# Altium PCB FlashCraft.PcbDoc
Units mm, origin at the board's own origin, x right, y up, seen from the top; angles counter-clockwise.
Board outline 45 x 68.88 mm, 7 copper layers (Top Layer, Prepreg 2, Power, Core, GND_plane, Prepreg 1, Bottom Layer), stack 3.405 mm thick; 69 components, 45 nets, 237 pads, 67 vias.
Unrouted connection lines stored in the file: 5.
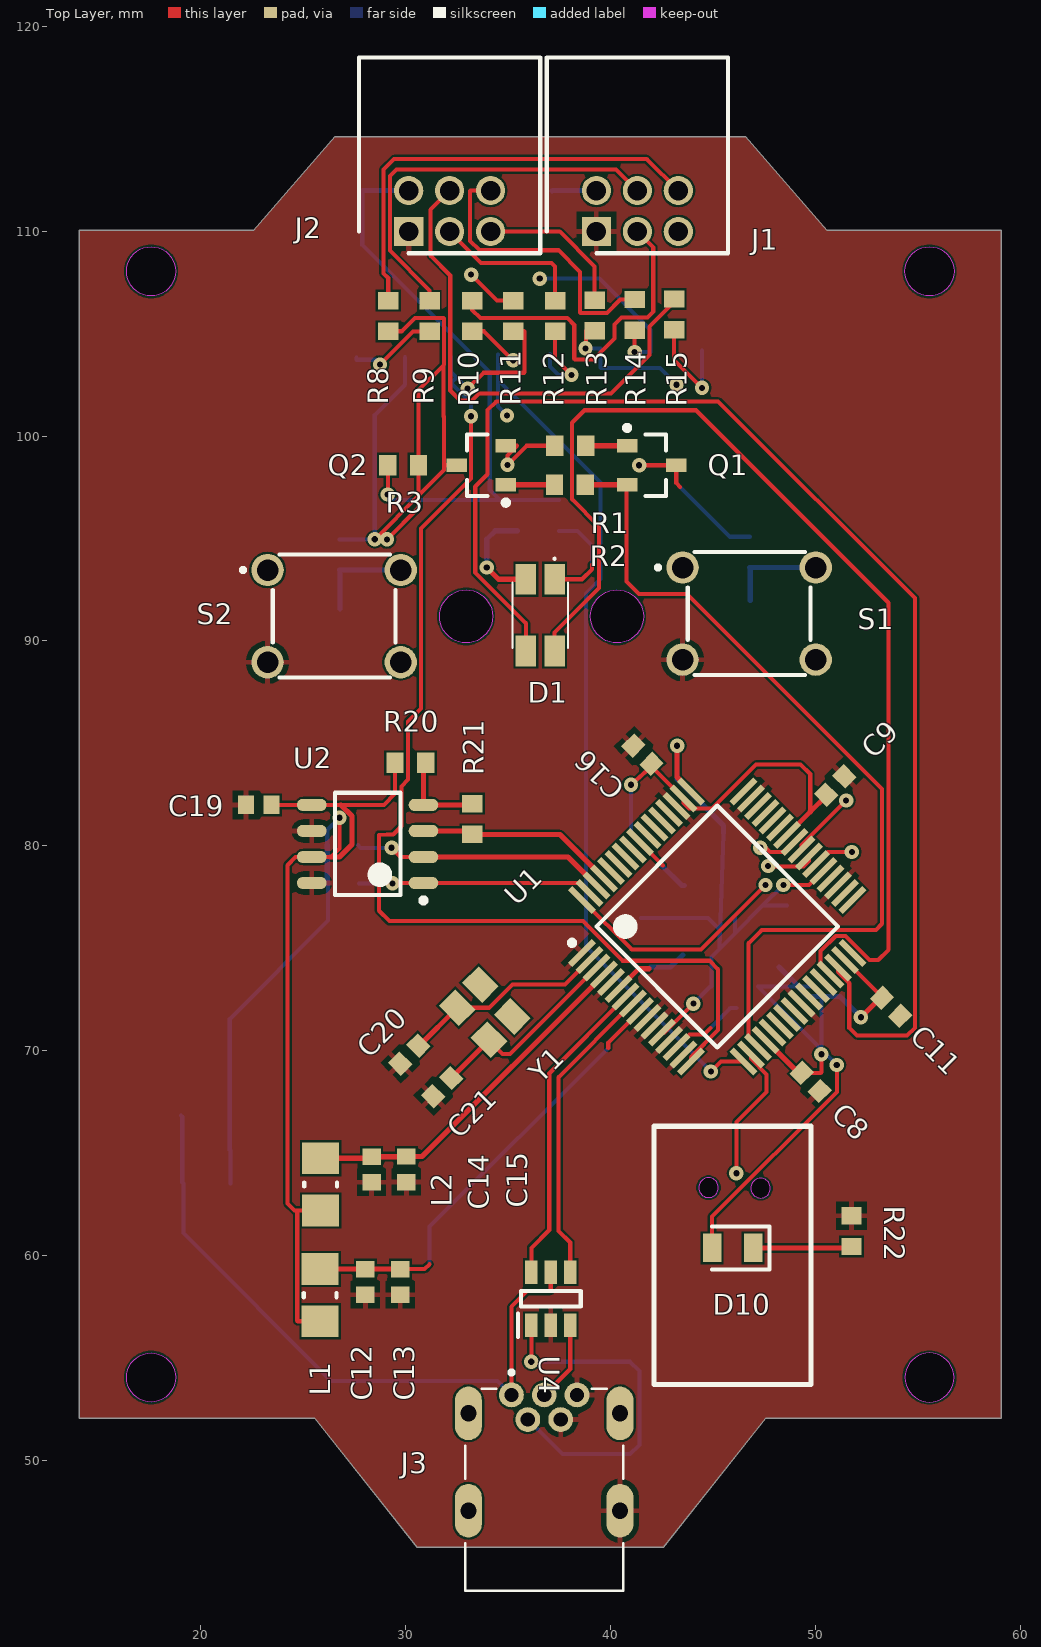
[diagram p0: Top Layer view]
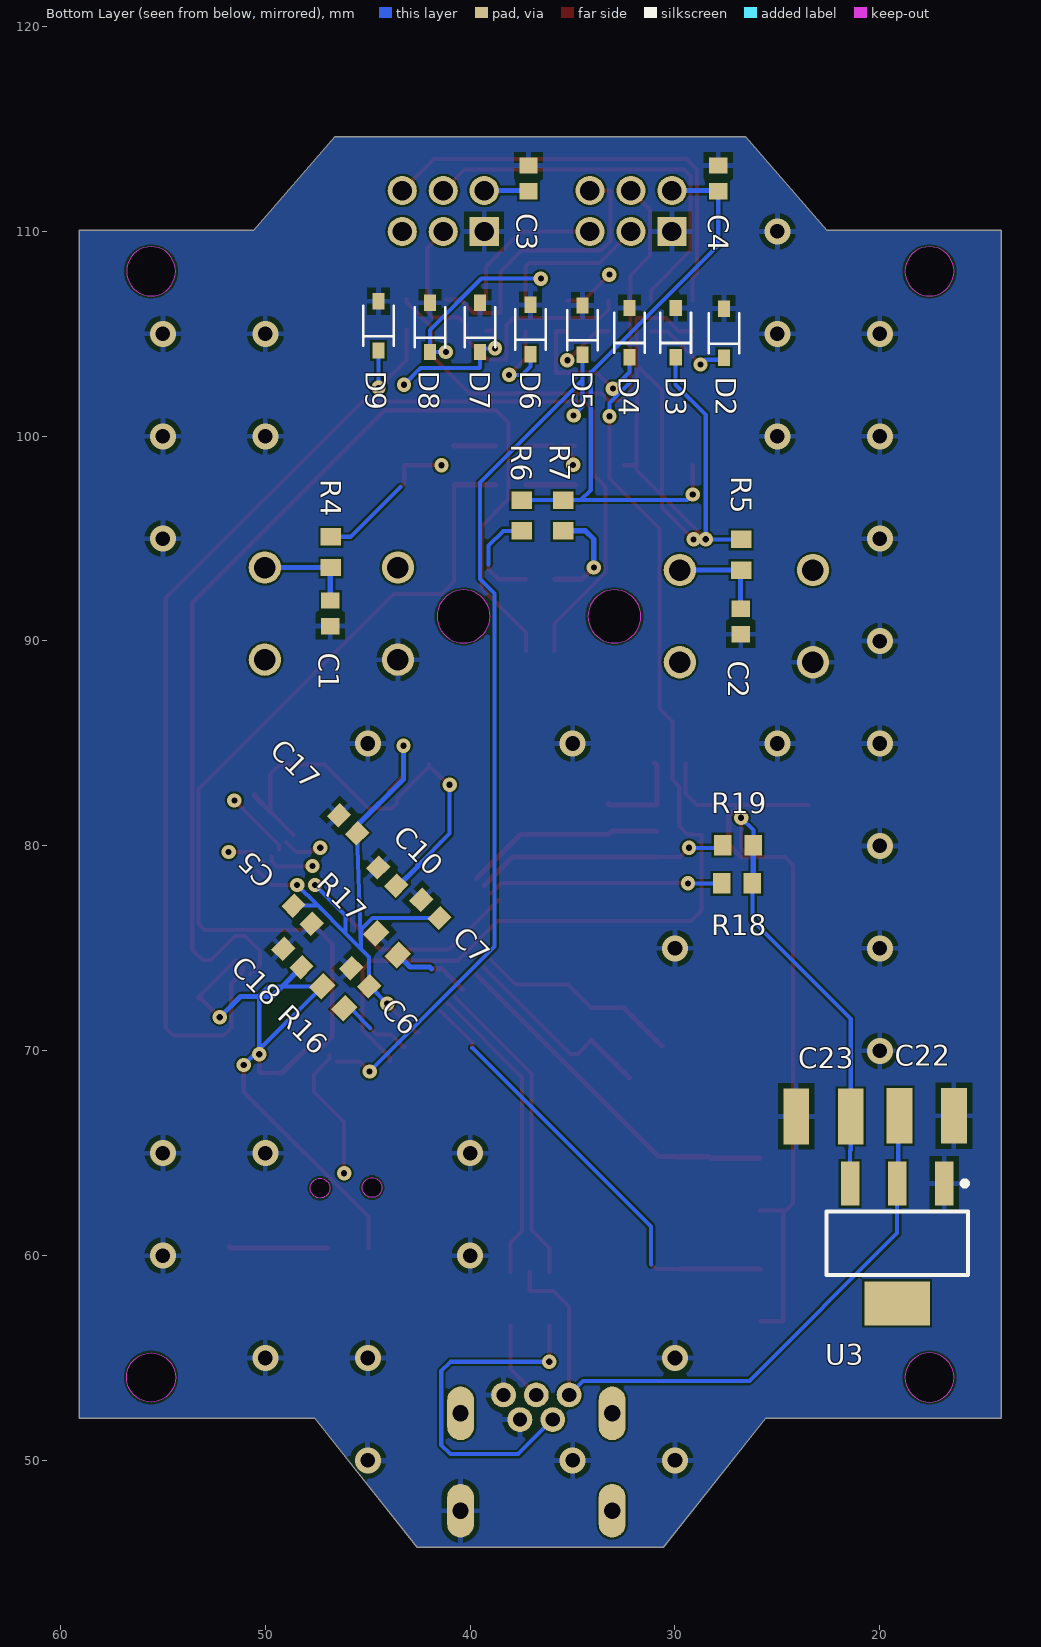
[diagram p1: Bottom Layer view, seen from below]
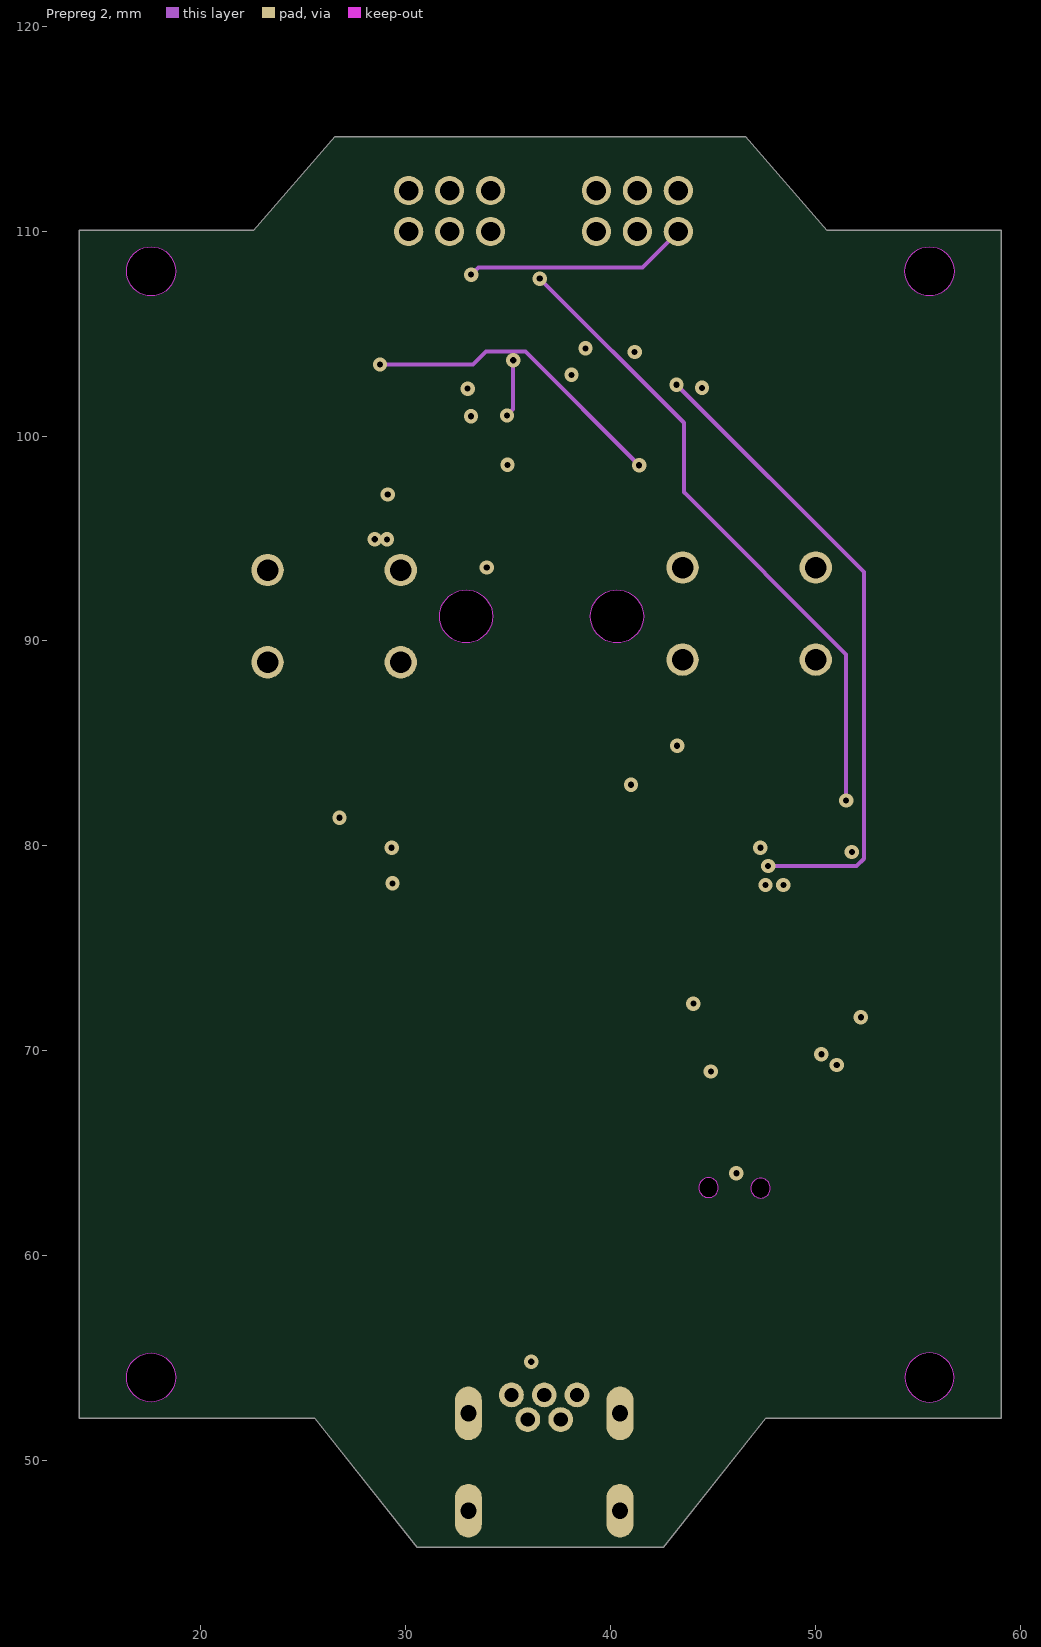
[diagram p2: Prepreg 2]
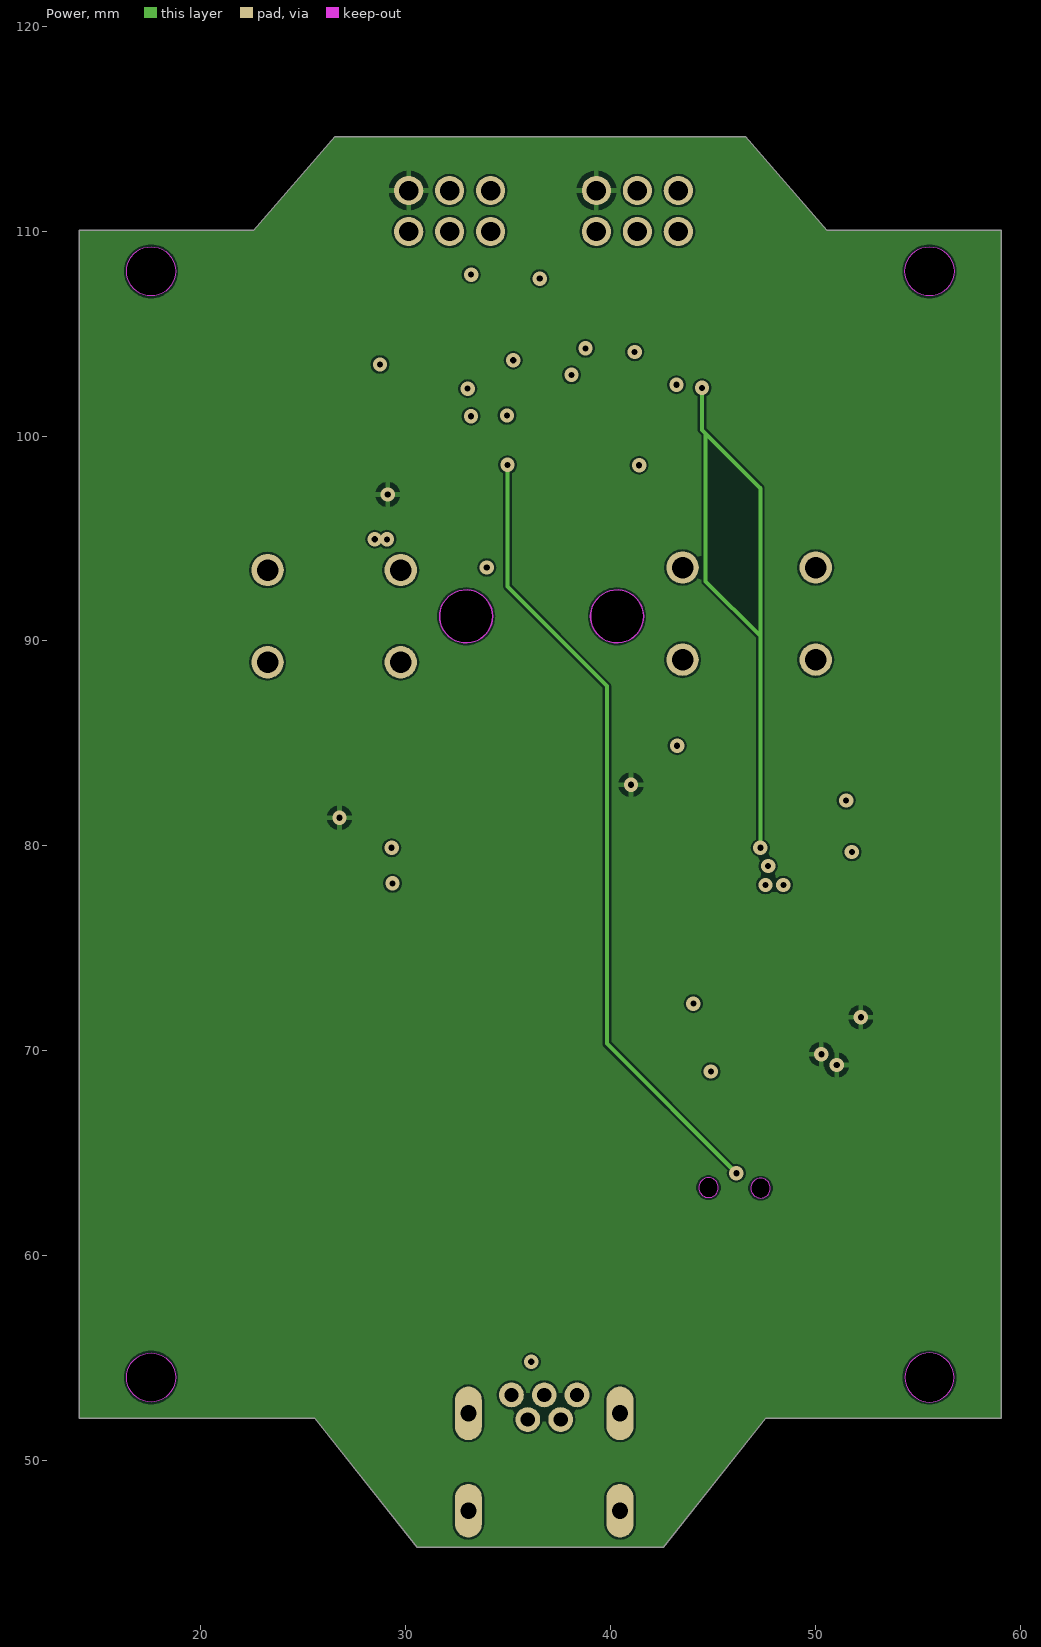
[diagram p3: Power]
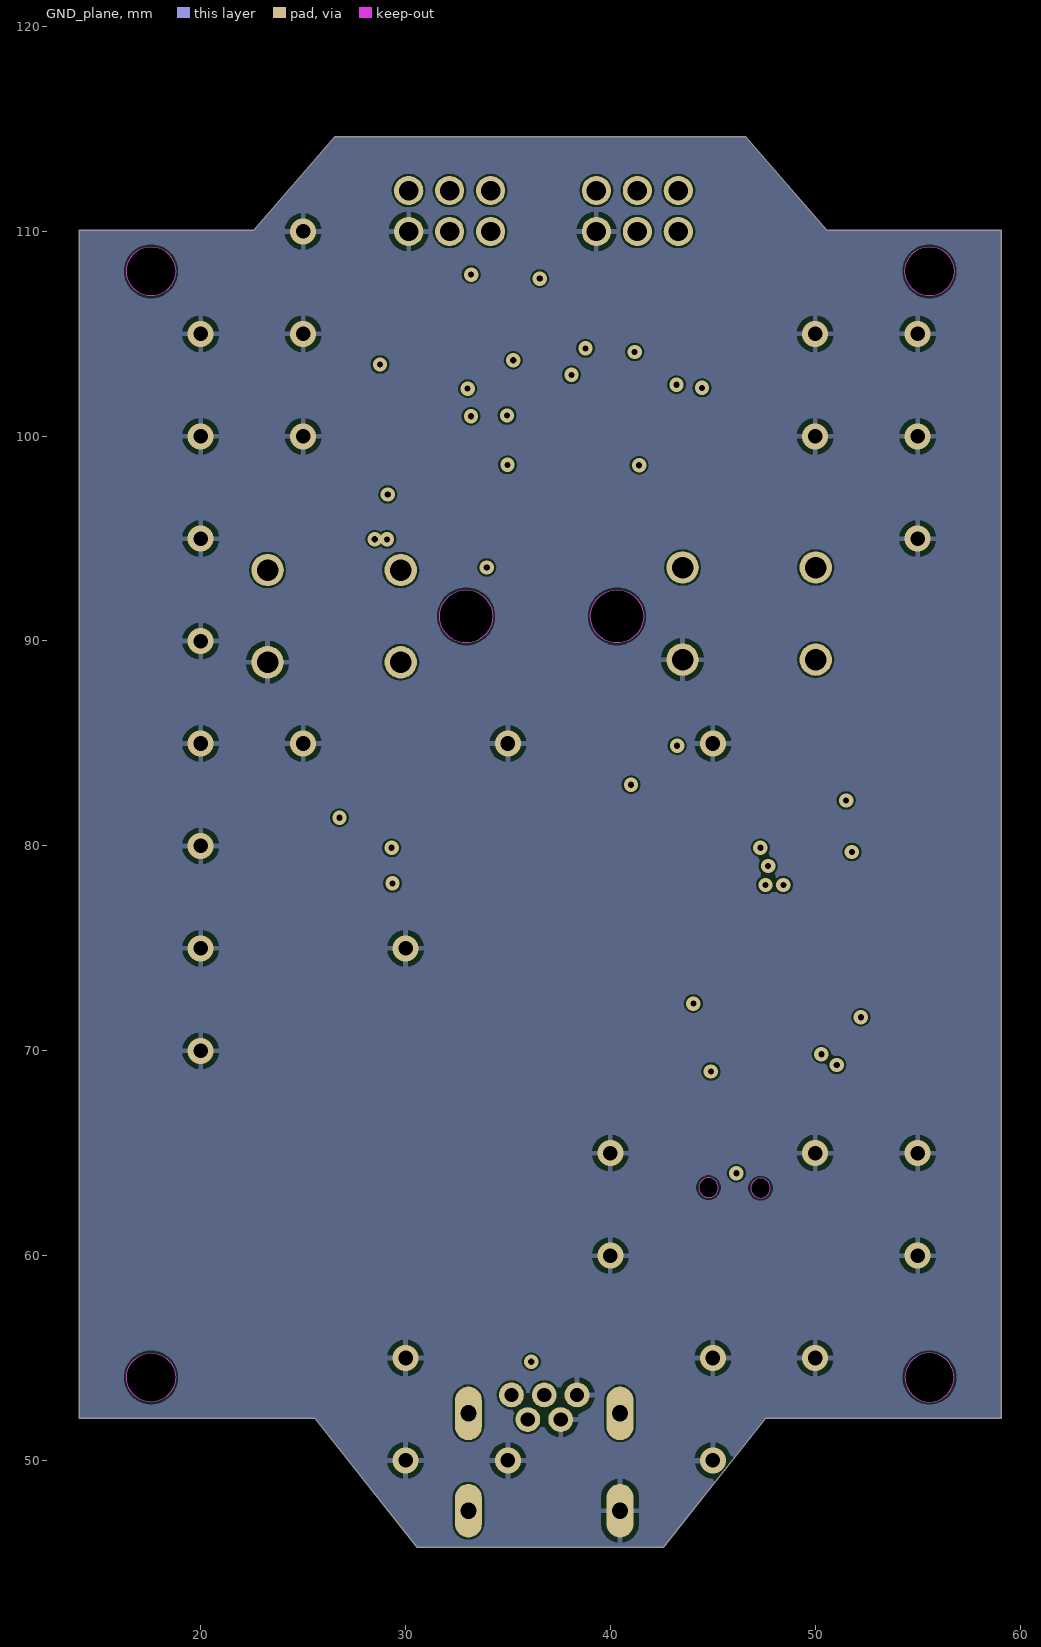
[diagram p4: GND_plane]
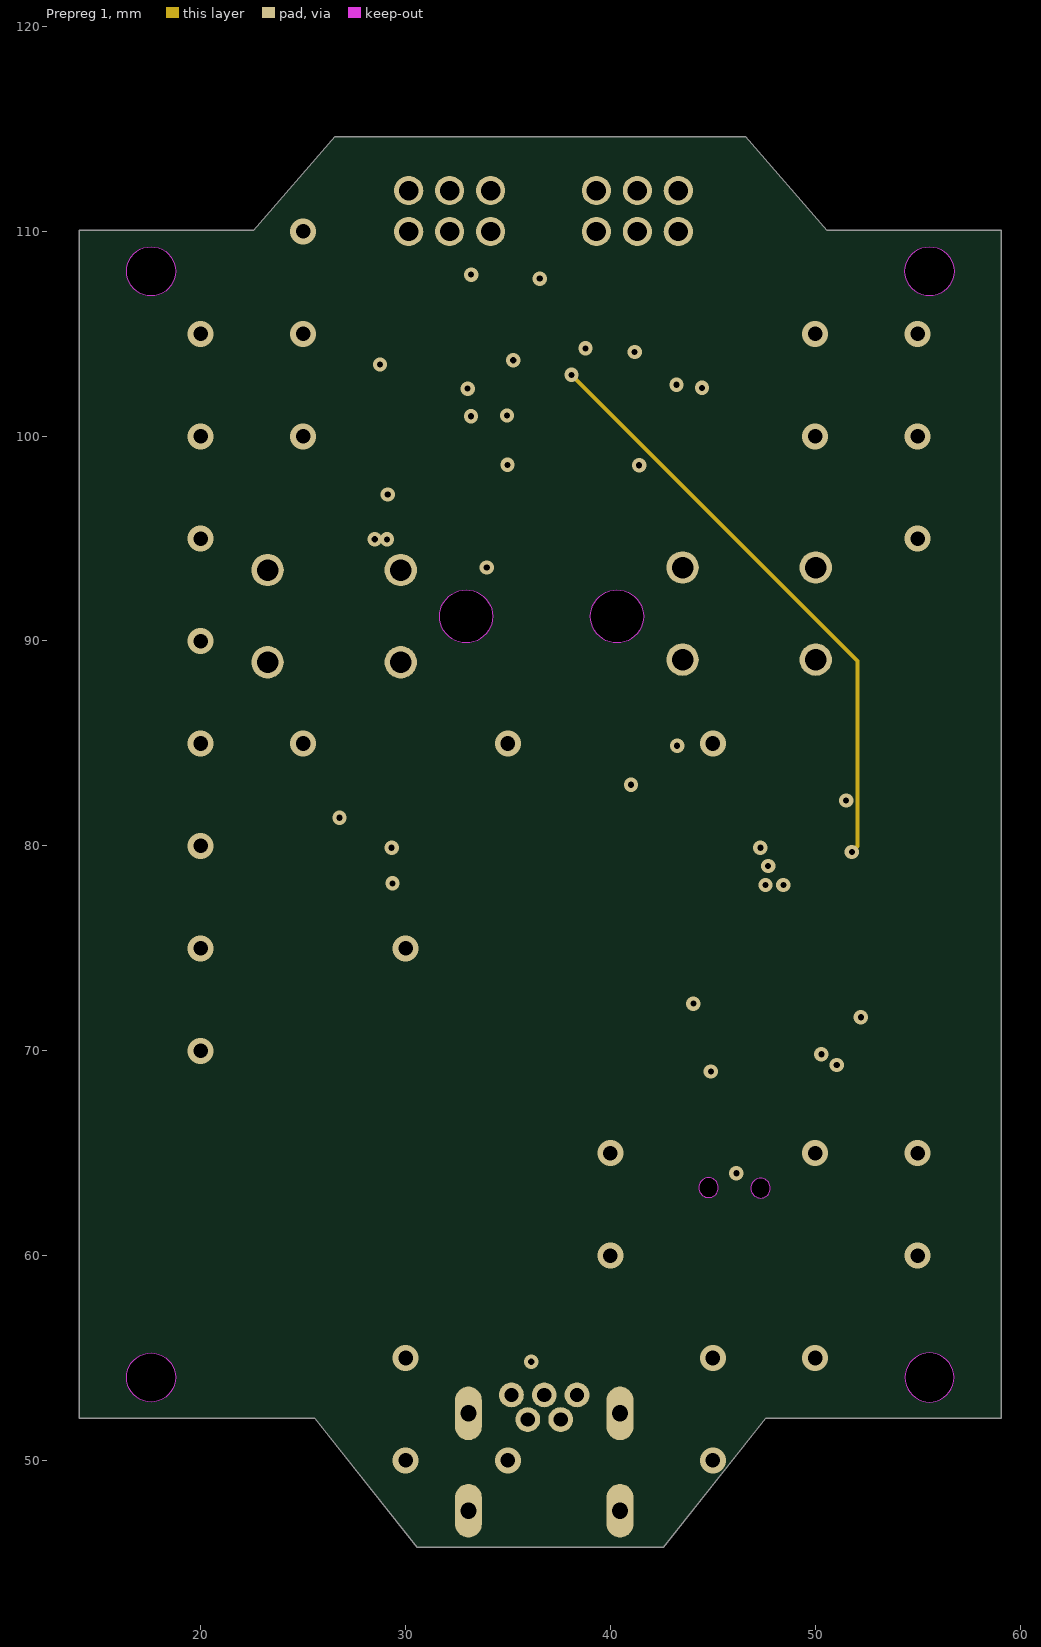
[diagram p5: Prepreg 1]
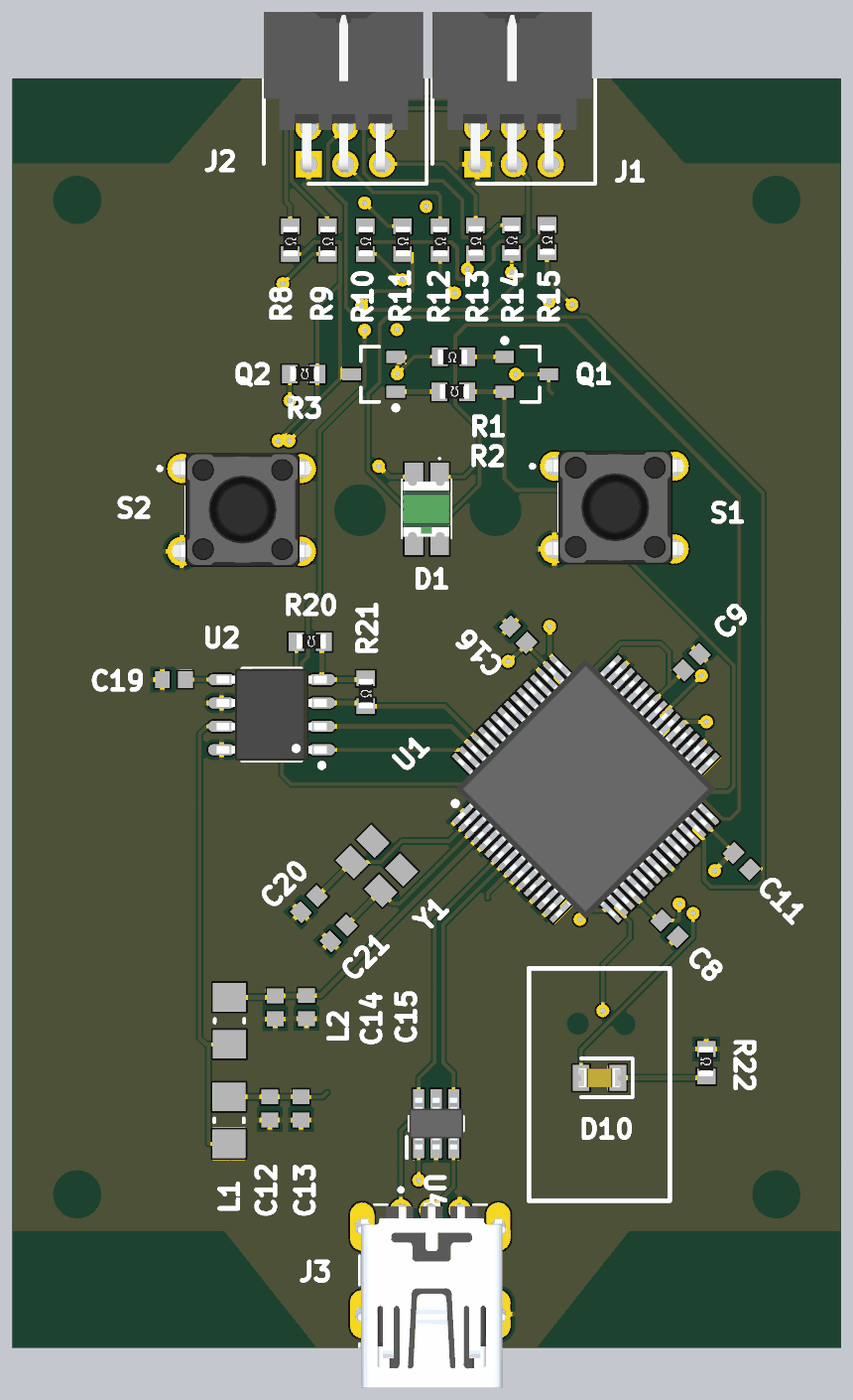
[diagram p6: 3D render of the assembled board from above, using the file's embedded part models]
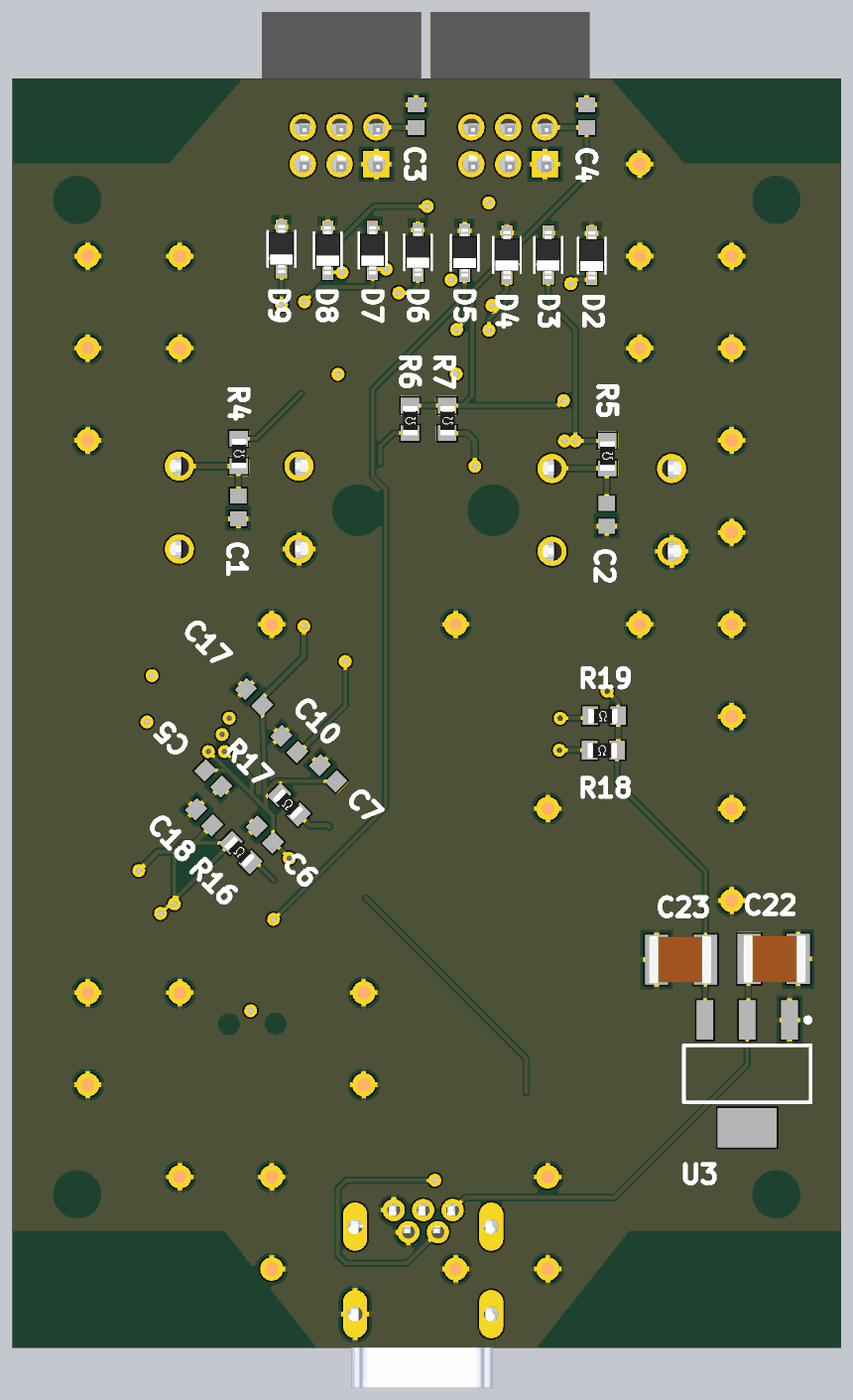
[diagram p7: 3D render of the assembled board from below, using the file's embedded part models]

## Layer stack, top to bottom
Top Solder: solder mask 0.0102, Solder Resist, Dk 3.5
Top Layer: signal copper 0.035
Dielectric 6: prepreg 0.0711, PP-006, Dk 4.1
Prepreg 2: signal copper 0.2
Dielectric 5: prepreg 0.0711, PP-006, Dk 4.1
Power: signal copper 0.035
Dielectric 1: dielectric 1.509, FR-4, Dk 4.8
Core: signal copper 1
Dielectric 4: prepreg 0.0711, PP-006, Dk 4.1
GND_plane: signal copper 0.035
Dielectric 3: prepreg 0.0711, PP-006, Dk 4.1
Prepreg 1: signal copper 0.2
Dielectric 2: prepreg 0.0711, PP-006, Dk 4.1
Bottom Layer: signal copper 0.035
Bottom Solder: solder mask 0.0102, Solder Resist, Dk 3.5

## Board outline
25.572,52.045 30.572,45.745 42.572,45.745 47.572,52.045 59.072,52.045 59.072,110.045 50.572,110.045 46.59,114.624 26.553,114.624 22.572,110.045 14.072,110.045 14.072,52.045
cut-out: 40.316,89.903 cw(c40.316,91.198) 39.021,91.198 cw(c40.316,91.198) 40.316,92.494 cw(c40.316,91.198) 41.612,91.198 cw(c40.316,91.198)
cut-out: 32.95,89.903 cw(c32.95,91.198) 31.655,91.198 cw(c32.95,91.198) 32.95,92.494 cw(c32.95,91.198) 34.246,91.198 cw(c32.95,91.198)
cut-out: 55.572,106.845 cw(c55.572,108.045) 54.372,108.045 cw(c55.572,108.045) 55.572,109.245 cw(c55.572,108.045) 56.772,108.045 cw(c55.572,108.045)
cut-out: 54.372,54.045 ccw(c55.572,54.045) 55.572,52.845 ccw(c55.572,54.045) 56.772,54.045 ccw(c55.572,54.045) 55.572,55.245 ccw(c55.572,54.045)
cut-out: 44.303,63.313 ccw(c44.785,63.313) 44.785,62.83 ccw(c44.785,63.313) 45.268,63.313 ccw(c44.785,63.313) 44.785,63.795 ccw(c44.785,63.313)
cut-out: 46.843,63.285 ccw(c47.325,63.285) 47.325,62.802 ccw(c47.325,63.285) 47.808,63.285 ccw(c47.325,63.285) 47.325,63.767 ccw(c47.325,63.285)
cut-out: 17.572,106.845 cw(c17.572,108.045) 16.372,108.045 cw(c17.572,108.045) 17.572,109.245 cw(c17.572,108.045) 18.772,108.045 cw(c17.572,108.045)
cut-out: 17.572,52.845 cw(c17.572,54.045) 16.372,54.045 cw(c17.572,54.045) 17.572,55.245 cw(c17.572,54.045) 18.772,54.045 cw(c17.572,54.045)

## Design rules (kind name [scope] priority, off if disabled: settings)
Clearance [All] p1: gap=0.1 ignorepadtopadclearanceinfootprint=FALSE
DiffPairsRouting [All] p1: maxlimit=0.254 minlimit=0.254 mostfreqgap=0.254 toplayer_minwidth=0.1 toplayer_maxwidth=0.381 toplayer_prefwidth=0.381 midlayer1_minwidth=0.1 midlayer1_maxwidth=0.381 midlayer1_prefwidth=0.381 midlayer2_minwidth=0.1 midlayer2_maxwidth=0.381 midlayer2_prefwidth=0.381 midlayer3_minwidth=0.1 midlayer3_maxwidth=0.381 midlayer3_prefwidth=0.381 midlayer4_minwidth=0.1 midlayer4_maxwidth=0.381 midlayer4_prefwidth=0.381 midlayer5_minwidth=0.1 midlayer5_maxwidth=0.381 midlayer5_prefwidth=0.381 bottomlayer_minwidth=0.1 bottomlayer_maxwidth=0.381 bottomlayer_prefwidth=0.381 maxuncoupledlength=12.7
FanoutControl Fanout_Default [All] p1: bgadir=Out bgaviamode=Centered fanoutstyle=Auto fanoutdirection=Alternating viagrid=0.025 // Fanout_Default (Default Rule)
FanoutControl Fanout_Small [(CompPinCount < 5)] p2: bgadir=Out bgaviamode=Centered fanoutstyle=Auto fanoutdirection=OutThenIn viagrid=0.025 // Fanout_Small (Default Rule)
FanoutControl Fanout_LCC [IsLCC] p4: bgadir=Out bgaviamode=Centered fanoutstyle=Auto fanoutdirection=Alternating viagrid=0.025 // Fanout_LCC (Default Rule)
FanoutControl Fanout_BGA [IsBGA] p5: bgadir=Out bgaviamode=Centered fanoutstyle=Auto fanoutdirection=Alternating viagrid=0.025 // Fanout_BGA (Default Rule)
PlaneClearance [All] p1: clearance=0.254
PlaneConnect [All] p1: planeconnectstyle=Relief reliefexpansion=0.5 reliefentries=4 reliefconductorwidth=0.2 reliefairgap=0.3
PolygonConnect [All] p1: connectstyle=Relief reliefconductorwidth=0.254 reliefentries=4 polygonreliefangle="90 Angle" airgapwidth=0.254
PolygonConnect PolygonConnect_GND_VIA [isvia and InNet('GND')] p2: connectstyle=Relief reliefconductorwidth=0.254 reliefentries=4 polygonreliefangle="90 Angle" airgapwidth=0.254
RoutingVias [All] p1: holewidth=0.3 width=0.7 viastyle="Through Hole" minholewidth=0.3 minwidth=0.7 maxholewidth=0.3 maxwidth=0.7
SolderMaskExpansion [All] p1: expansion=0.102 istentingtop=FALSE
SupplyNets "Schematic Supply Nets" [InNet('1V8')] p1: voltage=0.000
SupplyNets "Schematic Supply Nets_1" [InNet('GND')] p2: voltage=0.000
SupplyNets "Schematic Supply Nets_2" [InNet('5V')] p3: voltage=0.000
SupplyNets "Schematic Supply Nets_3" [InNet('3V3')] p4: voltage=0.000
Width [All] p1: maxlimit=1 minlimit=0.2 preferedwidth=0.2
23 further rules are at their usual default settings.

## Classes and differential pairs
differential pair usb: +usb_P -usb_N

## Components (designator, comment, footprint, x,y, rotation, side; value= is the part's Value field where it differs from the comment)
C1 "Capacitor" CAP-0603 46.82,91.352 r90 bottom
C2 "Capacitor" CAP-0603 26.79,90.946 r90 bottom
C3 "Capacitor" CAP-0603 37.147,112.589 r270 bottom
C4 "Capacitor" CAP-0603 27.882,112.589 r270 bottom
C5 "Capacitor" CAP-0603 48.176,76.635 r45 bottom
C6 "Capacitor" CAP-0603 45.368,73.584 r225 bottom
C7 "Capacitor" CAP-0603 41.933,76.917 r225 bottom
C8 "Capacitor" CAP-0603 49.769,68.471 r135 top
C9 "Capacitor" CAP-0603 50.971,82.943 r225 top
C10 "Capacitor" CAP-0603 44.044,78.498 r225 bottom
C11 "Capacitor" CAP-0603 53.696,72.138 r135 top
C12 "Capacitor" CAP-0603 28.034,58.708 r90 top
C13 "Capacitor" CAP-0603 29.736,58.708 r90 top
C14 "Capacitor" CAP-0603 28.334,64.197 r90 top
C15 "Capacitor" CAP-0603 30.035,64.208 r90 top
C16 "Capacitor" CAP-0603 41.558,84.443 r315 top
C17 "Capacitor" CAP-0603 45.956,81.045 r225 bottom
C18 "Capacitor" CAP-0603 48.671,74.522 r225 bottom
C19 "Capacitor" CAP-0603 22.827,81.995 r0 top
C20 "Capacitor" CAP-0603 30.175,69.804 r45 top
C21 "Capacitor" CAP-0603 31.779,68.219 r45 top
C22 "Capacitor" CAP-1210 17.709,66.825 r0 bottom
C23 "Capacitor" CAP-1210 22.743,66.788 r180 bottom
D1 "LTST-C155KGJRKT" LTSTC155KGJRKT 36.571,91.262 r270 top
D2 "ESD7351HT1G" SOD-323-2 27.602,105.026 r90 bottom
D3 "ESD7351HT1G" SOD-323-2 29.964,105.052 r90 bottom
D4 "ESD7351HT1G" SOD-323-2 32.214,105.052 r90 bottom
D5 "ESD7351HT1G" SOD-323-2 34.511,105.179 r90 bottom
D6 "ESD7351HT1G" SOD-323-2 37.051,105.204 r90 bottom
D7 "ESD7351HT1G" SOD-323-2 39.515,105.306 r90 bottom
D8 "ESD7351HT1G" SOD-323-2 41.953,105.306 r90 bottom
D9 "ESD7351HT1G" SOD-323-2 44.468,105.382 r90 bottom
D10 "SML-H12U8TT86C" LEDC2012X90N 45.963,60.369 r180 top
J1 "Header 3X2" SHDR6W75P200_2X3_865X640X650P 39.31,109.989 r0 top locked
J2 "Header 3X2" SHDR6W75P200_2X3_865X640X650P 30.146,109.989 r0 top locked
J3 "USB_minB" XM7D-0512 36.765,52.289 r180 top locked
L1 "MPZ1608S102A" RESC3216X18N 25.825,58.062 r270 top
L2 "MPZ1608S102A" RESC3216X18N 25.85,63.469 r270 top
Q1 "BJT" SOT95P245X112-3N 42.011,98.577 r0 top
Q2 "BJT" SOT95P245X112-3N 33.688,98.577 r180 top
R1 "Resistor" R0603 38.036,99.527 r0 top
R2 "Resistor" R0603 38.016,97.627 r180 top
R3 "Resistor" R0603 29.878,98.577 r180 top
R4 "Resistor" R0603 46.796,94.336 r90 bottom
R5 "Resistor" R0603 26.766,94.211 r90 bottom
R6 "Resistor" R0603 37.478,96.126 r90 bottom
R7 "Resistor" R0603 35.459,96.126 r90 bottom
R8 "Resistor" R0603 29.149,105.867 r90 top
R9 "Resistor" R0603 31.171,105.867 r90 top
R10 "Resistor" R0603 33.241,105.867 r90 top
R11 "Resistor" R0603 35.261,105.867 r90 top
R12 "Resistor" R0603 37.293,105.867 r90 top
R13 "Resistor" R0603 39.223,105.893 r90 top
R14 "Resistor" R0603 41.179,105.918 r90 top
R15 "Resistor" R0603 43.109,105.943 r90 top
R16 "Resistor" R0603 46.68,72.606 r225 bottom
R17 "Resistor" R0603 44.053,75.197 r225 bottom
R18 "Resistor" R0603 26.964,78.165 r180 bottom
R19 "Resistor" R0603 26.921,80.034 r180 bottom
R20 "Resistor" R0603 30.23,84.047 r180 top
R21 "Resistor" R0603 33.251,81.307 r90 top
R22 "Resistor" R0603 51.765,61.189 r270 top
S1 "SW-PB" SKHHDHA010 43.519,93.586 r0 top locked
S2 "SW-PB" SKHHDHA010 23.259,93.461 r0 top locked
U1 "FT2232HL-REEL" TSQFP50P1200X1200X160-64N 45.211,76.059 r45 top
U2 "93C46" SOIC127P600X175-8N 28.141,80.09 r180 top
U3 "Voltage Regulator" REG-SOT230P700X180-4N 19.149,60.591 r270 bottom
U4 "USBLC6-2SC6" SOT95P280X145 37.084,57.887 r90 top
Y1 "XTAL4" WE-4XTAL3.2x2.5mm 33.857,71.879 r315 top

## Footprints (in the part's own frame and the unit in brackets; to place one, negate y for a bottom-side part, rotate by r counter-clockwise, add the part's x,y. Pads: shape width x height; smd on the part's side, far side on the other; paste and mask are expansions set on the pad)
CAP-0603 [mm]
  rect 0.8x0.9 smd: 1(-0.625,0) 2(0.625,0)
  body extent -0.87,-0.48 0.87,0.48, height 0.9
CAP-1210 [mm]
  rect 1.26x2.72 smd: 1(-1.33,0) 2(1.33,0)
  body extent -1.75,-1.3 1.65,1.3, height 1.5
LEDC2012X90N [mm]
  rect 0.9x1.4 smd: 1(-1,0) 2(1,0)
  silkscreen extent -1.8,-1.05 1,1.05, body extent -1.15,-0.51 1.15,0.51, height 0.82
LTSTC155KGJRKT [mm]
  rect 1.5x1 smd: 1(-1.75,0.7) 2(-1.75,-0.7) 3(1.75,0.7) 4(1.75,-0.7)
  silkscreen extent -2.8,-1.35 1.6,1.35, body extent -1.5,-1.27 1.5,1.23, height 1.1
R0603 [mm]
  rect 0.85x1 smd: 1(-0.75,0) 2(0.75,0)
  body extent -0.87,-0.42 0.73,0.38, height 0.47
REG-SOT230P700X180-4N [mm] "SOT223, 4-Leads, Body 6.60x7.00mm (avg), Pitch 2.30mm, IPC Medium Density"
  rect 2.15x0.9 smd: 1(-2.925,2.3) 2(-2.925,0) 3(-2.925,-2.3)
  rect 2.15x3.2 smd: 4(2.925,0)
  silkscreen extent -3.05,-3.45 1.55,3.45, body extent -1.85,-3.45 1.85,3.45, height 1.8
RESC3216X18N [mm] "Chip Resistor, 2-Leads, Body 3.20x1.60mm, IPC Medium Density"
  rect 1.55x1.8 smd: 1(-1.275,0) 2(1.275,0)
  silkscreen extent -0.1,-0.8 0.1,0.8, body extent -1.7,-0.9 1.7,0.9, height 1.8
SHDR6W75P200_2X3_865X640X650P [mm]
  rect 1.425x1.425 / inner round 1.425 / far side rect 1.425x1.425 hole 0.95: 1(0,0)
  round 1.425 hole 0.95: 2(0,2) 3(2,0) 4(2,2) 5(4,0) 6(4,2)
  silkscreen extent -2.42,-1.06 6.43,8.5, body extent -2.42,-0.39 6.24,8.26, height 6.45
SKHHDHA010 [mm]
  round 1.58 hole 1.05: 1(0,0) 2(6.5,0) 3(0,-4.5) 4(6.5,-4.5)
  silkscreen extent -1.3,-5.25 6.25,0.75, body extent -0.65,-5.33 7.25,0.87, height 17
SOD-323-2 [mm]
  rect 0.8x0.6 smd paste-0.025 mask+0.07: 1(1.2,0) 2(-1.2,0)
  silkscreen extent -0.97,-0.75 0.98,0.75, body extent -1.3,-0.67 1.3,0.68, height 1.1
SOIC127P600X175-8N [mm] "SOIC, 8-Leads, Body 4.90x3.90mm, Pitch 1.27mm, IPC Medium Density"
  oval 1.45x0.6 smd: 1(-2.725,1.905) 2(-2.725,0.635) 3(-2.725,-0.635) 4(-2.725,-1.905) 5(2.725,-1.905) 6(2.725,-0.635) 7(2.725,0.635) 8(2.725,1.905)
  silkscreen extent -2.85,-2.5 1.6,2.88, body extent -3,-2.5 3,2.5, height 1.75
SOT95P245X112-3N [mm] "SOT23, 3-Leads, Body 2.92x2.45mm, Pitch 0.95mm, IPC Medium Density"
  rect 1x0.65 smd: 1(-1.2,0.95) 2(-1.2,-0.95) 3(1.2,0)
  silkscreen extent -1.32,-1.5 0.7,1.95, body extent -0.7,-1.52 0.7,1.52, height 1.12
SOT95P280X145 [mm]
  rect 1.15x0.6 smd: 1(-1.3,0.95) 2(-1.3,0) 3(-1.3,-0.95) 4(1.3,-0.95) 5(1.3,0) 6(1.3,0.95)
  silkscreen extent -1.87,-1.46 0.38,1.6, body extent -1.4,-1.46 1.4,1.46, height 1.45
TSQFP50P1200X1200X160-64N [mm]
  rect 1.65x0.3 smd: 1(-5.575,3.75) 2(-5.575,3.25) 3(-5.575,2.75) 4(-5.575,2.25) 5(-5.575,1.75) 6(-5.575,1.25) 7(-5.575,0.75) 8(-5.575,0.25) 9(-5.575,-0.25) 10(-5.575,-0.75) 11(-5.575,-1.25) 12(-5.575,-1.75) 13(-5.575,-2.25) 14(-5.575,-2.75) 15(-5.575,-3.25) 16(-5.575,-3.75) 33(5.575,-3.75) 34(5.575,-3.25) 35(5.575,-2.75) 36(5.575,-2.25) 37(5.575,-1.75) 38(5.575,-1.25) 39(5.575,-0.75) 40(5.575,-0.25) 41(5.575,0.25) 42(5.575,0.75) 43(5.575,1.25) 44(5.575,1.75) 45(5.575,2.25) 46(5.575,2.75) 47(5.575,3.25) 48(5.575,3.75)
  rect 0.3x1.65 smd: 17(-3.75,-5.575) 18(-3.25,-5.575) 19(-2.75,-5.575) 20(-2.25,-5.575) 21(-1.75,-5.575) 22(-1.25,-5.575) 23(-0.75,-5.575) 24(-0.25,-5.575) 25(0.25,-5.575) 26(0.75,-5.575) 27(1.25,-5.575) 28(1.75,-5.575) 29(2.25,-5.575) 30(2.75,-5.575) 31(3.25,-5.575) 32(3.75,-5.575) 49(3.75,5.575) 50(3.25,5.575) 51(2.75,5.575) 52(2.25,5.575) 53(1.75,5.575) 54(1.25,5.575) 55(0.75,5.575) 56(0.25,5.575) 57(-0.25,5.575) 58(-0.75,5.575) 59(-1.25,5.575) 60(-1.75,5.575) 61(-2.25,5.575) 62(-2.75,5.575) 63(-3.25,5.575) 64(-3.75,5.575)
  silkscreen extent -5.7,-4.17 4.17,4.57, body extent -6,-6 6,6, height 1.6
WE-4XTAL3.2x2.5mm [mil]
  rect 55.12x45.28 smd: 1(-43.31,-31.5) 2(43.31,-31.5) 3(43.31,31.5) 4(-43.31,31.5)
XM7D-0512 [mm] "USB B mini"
  round 1.208 hole 0.7: 1(1.6,-0.9) 2(0.8,0.3) 3(0,-0.9) 4(-0.8,0.3) 5(-1.6,-0.9)
  oval 1.308x2.616 hole 0.8: SH1(-3.7,4.75) SH2(-3.7,0) SH3(3.7,0) SH4(3.7,4.75)
  silkscreen extent -3.85,-2.1 3.85,8.65, body extent -4.13,-1.1 3.98,8.75, height 4.05

## Part data
C1 C2 C3 C4 C5 C6 C7 C8 C9 C10 C11 C12 C15 C18 C19: library part C-000000011, Value 1=1uF, Value 2="50 VDC", DES="Multilayer Ceramic Capacitors MLCC - SMD/SMT Automotive Grade,MLCC,0603,X7R,50V,1uF,+/-10%,0.8mm", FTP=0603, MAN=TDK, MANREF=CGA3E3X7R1H105K080AB, NOTE=_, Part Number=C-000000011, SUP=Mouser, SUPREF=810-CGA3E3X7R1H105K0, TOL=10%
C13 C14 C16 C17: library part C-000000007, Value 1="4.7 uF", Value 2="25 VDC", DES=GRT188C81E475KE13D, FTP=0603, MAN="Multilayer Ceramic Capacitors MLCC - SMD/SMT 0603 25Vdc 4.7uF X6S 10%", MANREF="Murata Electronics", NOTE=_, Part Number=C-000000007, SUP=Mouser, SUPREF=81-GRT188C81E475KE3D, TOL=10%
C20 C21: library part C-000000010, Value 1=1nF, Value 2="50 VDC", DES=C0603C102K5RECTU, FTP=0603, MAN="Multilayer Ceramic Capacitors MLCC - SMD/SMT 50V 1000pF 0603 X7R 0.1", MANREF=KEMET, NOTE=_, Part Number=C-000000010, SUP=Mouser, SUPREF=80-C0603C102K5REC, TOL=10%
C22: library part C-000000004, Value 1="22 uF", Value 2="25 VDC", DES="Multilayer Ceramic Capacitors MLCC - SMD/SMT 22 uF 25 VDC 10% 1210 X7R", FTP=1210, MAN="Murata Electronics", MANREF=GRM32ER71E226KE15L, NOTE=_, Part Number=C-000000004, SUP=Mouser, SUPREF=81-GRM32ER71E226KE5L, TOL="10 %"
C23: library part C-000000005, Value 1="1 uF", Value 2="50 VDC", DES="Multilayer Ceramic Capacitors MLCC - SMD/SMT 50V 1uF X7R 1210 10%", FTP=1210, MAN="TAIYO YUDEN", MANREF=UMK325B7105KH-T, NOTE=_, Part Number=C-000000005, SUP=Mouser, SUPREF=963-UMK325B7105KH-T, TOL="10 %"
D1: library part LED-000000001, Value 1="20 mA", Value 2="2 V", DataSheet=https://eu.mouser.com/datasheet/2/239/LTST-C155KGJRKT-1141409.pdf, DES="Standard LEDs - SMD Green/Red Clear", MAN=Lite-On, MANREF=LTST-C155KGJRKT, N°=LED-000000001, SUP=Mouser, SUPREF=859-LTST-C155KGJRKT
D2 D3 D4 D5 D6 D7 D8 D9: library part D-000000004, Value 1="5 V", Value 2="3 A", DES="ESD Protection Diodes / TVS Diodes UNIDIRECTIONAL 3.3V ESD PR", FTP=SOD-323-2, MAN=onsemi, MANREF=ESD7351HT1G, NOTE=_, Part Number=D-000000004, SUP=Mouser, SUPREF=863-ESD7351HT1G, TOL=_, TOL1=_
D10: library part LED-000000002, Value 1="20 mA", Value 2="2.2 V", DataSheet=https://eu.mouser.com/datasheet/2/348/sml-h1(c)-e-1508182.pdf, DES="Standard LEDs - SMD Red 620nm 40mcd 2.2V; 20mA; 0603", MAN="ROHM Semiconductor", MANREF=SML-H12U8TT86C, N°=LED-000000002, SUP=Mouser, SUPREF=755-SML-H12U8TT86C
J1 J2: library part J-000000001, DES=87833-0620, FTP=THT, MAN="Headers & Wire Housings MGrid Hdr Shrd Vt W/ t W/Lck .76AuLF 6Ckt", MANREF="Molex / Molex", NOTE=_, Part Number=J-000000001, SUP=Mouser, SUPREF=538-87833-0620
J3: library part J-000000003, DES=XM7D-0512, FTP=THT, MAN="USB Connectors USB RightAngle DIP MiniB AuContact 5Pin", MANREF=Omron, NOTE="End of Life: Scheduled for obsolescence and will be discontinued by the manufacturer.", Part Number=J-000000003, SUP=Mouser, SUPREF=653-XM7D-0512
L1 L2: library part L-000000001, Value 1="1 k @100 MHz", Value 2="800 mA", DataSheet=https://eu.mouser.com/datasheet/2/400/eads_commercial_power_mpz1608_en-923650.pdf, DES="Ferrite Beads 1000ohms 0.3ohms 0.8A", MAN=TDK, MANREF=MPZ1608S102A, N°=L-000000001, SUP=Mouser, SUPREF=810-MPZ1608S102A
Q1 Q2: library part Q-000000003, Value 1=Mouser, Value 2=833-MMSS8050-H-TP, DataSheet=https://eu.mouser.com/datasheet/2/258/MMSS8050(SOT-23)-276387.pdf, DES=MMSS8050-H-TP, FTP="5 V", MAN="Bipolar Transistors - BJT 625mW, 25V, 1500mA", MANREF="Micro Commercial Components (MCC)", NOTE=NPN, Part Number=Q-000000003, SUP="1.5 A", SUPREF=Bipolar, TOL=SOT-23-3
R1 R2 R3 R4 R5 R6 R7 R8 R9 R10 R11 R12 R13 R14 R15 R22: library part R-000000002, Value 1="100 kOhms", Value 2="100 mW", DES="Thick Film Resistors - SMD 1/10watt 100Kohms 1%", FTP=R0603, MAN=Vishay, MANREF=CRCW0603100KFKEA, NOTE=-, Part Number=R-000000002, SUP=Mouser, SUPREF=71-CRCW0603-100K-E3, TOL="1 %"
R16 R17 R18 R19 R20 R21: library part R-000000002, Value 1=100k, Value 2="100 mW", DES="Thick Film Resistors - SMD 1/10watt 100Kohms 1%", FTP=R0603, MAN=Vishay, MANREF=CRCW0603100KFKEA, NOTE=-, Part Number=R-000000002, SUP=Mouser, SUPREF=71-CRCW0603-100K-E3, TOL="1 %"
S1 S2: library part SW-000000001, DataSheet=https://eu.mouser.com/datasheet/2/15/SKHH-1370651.pdf, DES="Tactile Switches 50 mAmps at 12 Volts", MAN="ALPS  / Gravitech / Gravitech", MANREF=SKHHDHA010, N°=SW-000000001, SUP=Mouser, SUPREF=688-SKHHDHA010
U1: library part U-000000002, Value 1=Mouser, Value 2=LQFP-64, DES=FT2232HL-REEL, MAN="USB Interface IC USB HS to Dual UART/ FIFO/SPI/JTAG/I2C", MANREF=FTDI, NOTE=https://eu.mouser.com/datasheet/2/163/DS_FT2232H-17353.pdf, Part Number=U-000000002, TOL=895-FT2232HL
U2: library part U-000000003, Value 1=Mouser, Value 2=SOIC-8, DES=93C46B-I/SN, MAN="EEPROM 64x16", MANREF="Microchip Technology", NOTE=https://eu.mouser.com/datasheet/2/268/20001749K-277859.pdf, Part Number=U-000000003, TOL=579-93C46B-I/SN
U3: library part U-000000004, Value 1=Mouser, Value 2=SOT-223-3, DES=XC6203E332FR-G, FTP="8 V", MAN="LDO Voltage Regulators", MANREF="Torex Semiconductor", NOTE=https://eu.mouser.com/datasheet/2/760/XC6203-846590.pdf, Part Number=U-000000004, SUP="3.3 V", TOL=865-XC6203E332FR-G
U4: library part U-000000006, Value 1=Mouser, Value 2=SOT-666, DES=USBLC6-2SC6, MAN="ESD Suppressors / TVS Diodes ESD Protection Low Cap", MANREF=STMicroelectronics, NOTE=https://eu.mouser.com/datasheet/2/389/usblc6-2-957370.pdf, Part Number=U-000000006, TOL=511-USBLC6-2SC6
Y1: library part Y-000000002, Value 1="12 MHZ", Value 2="10 Pf", DataSheet=https://www.we-online.com/components/products/datasheet/830105420809.pdf, DES="Crystals WE-XTAL 12.0MHz 10ppm 3.2 x 2.5mm", MAN="Wurth Elektronik", MANREF=830105420809, N°=Y-000000002, SUP=Mouser, SUPREF=710-830105420809, TOL="10 PPM"

## Via types
v1: diameter 0.7, hole 0.3, Top Layer to Bottom Layer, 36 vias
v2: diameter 1.27/1.27/1.27 (per signal layer), hole 0.711, GND_plane to Bottom Layer, 31 vias

## Nets (pads, with @x,y where several pads share a name; then routed paths per layer and width w, separated by ;. In a path a pad name is that pad's centre, name@x,y a point inside that pad or via, vN(x,y) a via of type N, cw(c..) or ccw(c..) an arc to the next point about the centre after c; other vN are vias at no path point)
1V8: C5.2 C6.2 C7.2 C17.2 U1.12 U1.37 U1.49 U1.64 | length 45.8
  Top Layer w0.2: U1.64 41.038,74.928 44.408,74.928 v1(47.569,78.088) ; U1.12 42.63,70.879 v1(44.044,72.294) ; v1(48.441,78.088) 49.683,78.088 50.358,78.764 U1.37
  Top Layer w0.254: v1(43.252,84.885) 43.252,83.354 43.92,82.685 U1.49
  Bottom Layer w0.2: C7.2 44.761,76.476 45.318,75.919 45.318,74.966 ; v1(44.044,72.294) 44.892,73.142 C6.2 44.926,74.574 45.318,74.966 ; C17.2 45.318,74.966 ; v1(47.569,78.088) 46.073,76.593 46.073,75.721 ; v1(48.441,78.088) 47.429,77.076 ; C5.2 47.429,77.076 ; 45.318,74.966 46.073,75.721 ; 46.073,75.721 47.429,77.076
  Bottom Layer w0.254: v1(43.252,84.885) 43.252,83.251 45.514,80.989 C17.2
3V3: C3.2 C4.2 C8.2 C9.2 C10.2 C11.2 C16.2 C18.2 C19.2 C23.2 D10.2 J1.2 J2.2 L1.2 L2.2 R3.2 R6.2 R7.2 R16.1 R18.2 R19.2 R20.2 U1.20 U1.31 U1.42 U1.50 U1.56 U2.5 U2.7 U3.3 | length 152.6
  Top Layer w0.2: C19.2 U2.5 26.832,81.995 28.932,81.995 29.48,82.543 R20.2 ; L1.2 24.733,56.787 24.708,56.812 24.708,62.169 24.733,62.194 ; L2.2 24.733,62.194 ; v1(26.767,81.367) 26.767,79.876 26.346,79.455 U2.7 24.63,79.455 24.225,79.05 24.225,62.54 24.571,62.194 24.733,62.194 ; v1(29.128,97.148) R3.2 ; v1(40.999,82.98) C16.2@42,83.866 ; U1.56 41.445,80.145 42.552,79.039 ; C16.2 C16.2@42,83.866 ; D10.2 44.963,61.904 51.048,67.989 v1(51.048,69.299) ; U1.42 49.752,81.661 49.752,83.495 49.282,83.965 47.098,83.965 44.955,81.822 43.832,81.822 43.567,82.087 U1.50 C16.2@42,83.866 ; C8.2 50.26,68.913 50.292,68.945 v1(50.292,69.82) ; U1.31 53.254,72.612 C11.2
  Top Layer w0.254: 26.346,79.455 26.767,79.455 27.375,80.063 27.375,81.452 26.832,81.995 ; U1.20 49.175,68.913 C8.2 ; 49.752,81.661 50.529,82.438 C9.2 ; v1(52.222,71.626) 53.175,72.58 C11.2
  Bottom Layer w0.2: U3.3 21.449,65.118 21.413,65.154 C23.2 21.413,71.552 26.214,76.353 R18.2 ; R19.2 26.171,80.771 v1(26.767,81.367) ; C4.2 27.882,109.34 34.106,103.116 34.106,97.371 34.601,96.876 ; v1(29.128,97.148) 29.4,96.876 34.601,96.876 ; R6.2 R7.2 34.601,96.876 ; v1(40.999,82.98) 40.999,80.591 42.552,79.039 ; v1(50.292,69.82) v1@50.292,70.054 ; v1(51.048,69.299) v1@50.292,70.054 ; v1@50.292,70.054 R16.1 49.173,73.136 49.856,73.136 50.292,72.7 50.292,72.647 v1@50.292,70.054
  Bottom Layer w0.254: R19.2 26.171,78.208 R18.2 ; C4.2 27.907,111.989 J2.2 ; C3.2 37.172,111.989 J1.2 ; 42.552,79.039 42.552,78.993 43.489,78.057 C10.2 ; C18.2 49.173,73.136 49.662,72.647 50.292,72.647 51.201,72.647 v1(52.222,71.626)
5V: C22.2 J3.1 U3.2 U4.5 | length 32.5
  Top Layer w0.2: J3.1 35.165,57.498 35.929,58.262 37.052,58.262 37.084,58.293 U4.5
  Bottom Layer w0.2: C22.2 19.094,66.77 19.094,63.57 U3.2 19.149,61.091 26.365,53.874 34.479,53.874 J3.1
ESP-EN: D2.2 Q1.3 R4.2 R9.1 | length 27
  Top Layer w0.2: v1(28.746,103.498) 30.366,105.117 R9.1 ; v1(41.396,98.577) Q1.3 43.211,97.702 43.392,97.521
  Prepreg 2 w0.2: v1(28.746,103.498) 33.289,103.498 33.915,104.124 35.849,104.124 v1(41.396,98.577)
  Bottom Layer w0.2: D2.2 27.602,103.726 28.518,103.726 v1(28.746,103.498) ; 43.392,97.521 45.827,95.086 R4.2
ESP-GPIO0: D3.2 Q2.3 R3.1 R5.2 R8.1 | length 42.1
  Top Layer w0.2: v1(28.492,94.963) 30.628,97.099 ; v1(29.087,94.961) 30.628,96.502 30.628,97.099 ; R8.1 29.807,105.117 30.448,105.758 31.846,105.758 31.871,105.733 31.871,103.484 31.841,103.454 ; Q2.3 31.871,98.577 31.841,103.454 ; 30.628,97.099 R3.1 30.628,102.241 31.841,103.454 ; 30.628,97.099 31.871,98.342 31.841,103.454
  Bottom Layer w0.2: R5.2 v1(29.087,94.961) ; v1(28.492,94.963) 28.492,101.035 29.964,102.507 D3.2
ESP-RXD: D5.2 R10.1 U1.17 | length 49
  Top Layer w0.2: R10.1 33.833,105.117 v1(35.249,103.701) ; v1(44.901,68.979) 45.387,69.465 U1.17
  Prepreg 2 w0.2: v1(34.944,101.009) 35.249,101.313 v1(35.249,103.701)
  Bottom Layer w0.2: D5.2 34.511,102.737 ; v1(34.944,101.009) 34.511,101.442 34.511,102.737 ; v1(44.901,68.979) 38.805,75.075 38.805,92.322 39.516,93.033 39.516,97.732 34.511,102.737
ESP-TCK: D6.2 R12.1 U1.38 | length 35.5
  Top Layer w0.2: R12.1 37.293,103.791 v1(38.094,102.99) ; U1.38 50.618,79.698 v1(51.784,79.698)
  Prepreg 1 w0.2: v1(38.094,102.99) 52.064,89.02 52.064,79.977 v1(51.784,79.698)
  Bottom Layer w0.2: D6.2 37.051,103.398 37.459,102.99 v1(38.094,102.99)
ESP-TDI: D7.2 R13.1 U1.39 | length 41.1
  Top Layer w0.2: v1(38.779,104.285) 38.805,104.311 38.805,105.143 R13.1 ; v1(47.695,79.012) 47.714,78.993 49.418,78.993 49.683,79.259 U1.39
  Prepreg 2 w0.2: v1(43.224,102.507) 52.368,93.363 52.368,79.368 52.013,79.012 v1(47.695,79.012)
  Bottom Layer w0.2: v1(38.779,104.285) 39.515,104.285 D7.2 39.515,103.345 39.54,103.32 42.412,103.32 v1(43.224,102.507)
ESP-TDO: D8.2 R14.1 U1.40 | length 44.3
  Top Layer w0.2: v1(41.179,104.107) R14.1 ; U1.40 49.33,80.036 v1(51.505,82.212)
  Prepreg 2 w0.2: v1(36.544,107.689) 43.58,100.653 43.58,97.261 51.505,89.337 v1(51.505,82.212)
  Bottom Layer w0.2: v1(36.544,107.689) 39.453,107.689 41.953,105.188 D8.2@41.953,104.107 ; v1(41.179,104.107) D8.2@41.953,104.107 ; D8.2 D8.2@41.953,104.107
ESP-TMS: D9.2 R15.1 U1.41 | length 45.2
  Top Layer w0.2: v1(44.468,102.355) 43.097,103.725 43.097,105.193 R15.1 43.109,103.715 v1(44.468,102.355) ; v1(47.314,79.901) 47.593,79.901 47.796,79.698 48.496,79.698 U1.41
  Power w0.2: v1(44.468,102.355) 44.469,100.297 44.647,100.12 ; v1(47.314,79.901) 47.314,90.239 ; 44.647,100.12 47.314,97.453 47.314,90.239 ; 44.647,100.12 44.647,92.906 47.314,90.239
  Bottom Layer w0.2: v1(44.468,102.355) D9.2
ESP-TXD: D4.2 R11.1 U1.16 | length 59.1
  Top Layer w0.2: v1(33.026,102.317) 33.801,103.091 35.773,103.091 35.799,103.117 35.799,105.101 35.782,105.117 R11.1 ; v1(33.191,100.971) 33.191,97.935 30.753,95.497 30.753,86.708 30.118,86.073 30.118,83.229 29.788,82.898 29.788,80.955 29.394,80.562 28.696,80.536 28.696,76.828 29.204,76.32 38.652,76.32 40.583,74.389 44.837,74.389 45.256,73.97 45.256,71.013 43.92,69.677 U1.16
  Bottom Layer w0.2: D4.2 32.214,103.129 32.487,102.856 ; v1(33.026,102.317) 32.487,102.856 ; v1(33.191,100.971) 33.191,101.606 32.214,102.583 32.487,102.856
GND: C1.1 C2.1 C3.1 C4.1 C5.1 C6.1 C7.1 C8.1 C9.1 C10.1 C11.1 C12.1 C13.1 C14.1 C15.1 C16.1 C17.1 C18.1 C19.1 C20.1 C21.1 C22.1 C23.1 D2.1 D3.1 D4.1 D5.1 D6.1 D7.1 D8.1 D9.1 J1.1 J2.1 J3.4 J3.5 J3.SH1 R17.1 R22.1 S1.3 S2.3 U1.1 U1.5 U1.10 U1.11 U1.13 U1.15 U1.25 U1.35 U1.47 U1.51 U2.6 U2.8 U3.1 U4.2
  other v2: 29.994,49.993 34.994,49.993 44.994,49.993 29.994,54.993 44.994,54.993 49.994,54.993 39.994,59.993 54.994,59.993 39.994,64.993 49.994,64.993 54.994,64.993 19.994,69.993 19.994,74.993 29.994,74.993 19.994,79.993 19.994,84.993 24.994,84.993 34.994,84.993 44.994,84.993 19.994,89.993 19.994,94.993 54.994,94.993 19.994,99.993 24.994,99.993 49.994,99.993 54.994,99.993 19.994,104.993 24.994,104.993 49.994,104.993 54.994,104.993 24.994,109.993
NetC1_2: C1.2 R4.1 S1.2 | length 4.8
  Bottom Layer w0.254: C1.2 46.82,93.561 R4.1 S1.2
NetC2_2: C2.2 R5.1 S2.2 | length 4.9
  Bottom Layer w0.254: C2.2 26.79,93.437 R5.1 S2.2
NetC12_2: C12.2 C13.2 L1.1 U1.9 | length 22.1
  Top Layer w0.2: C13.2 30.927,59.333 31.163,59.569 ; 39.891,70.134 39.891,70.386 U1.9
  Top Layer w0.254: L1.1 28.031,59.337 C12.2 C13.2
  Bottom Layer w0.2: 31.163,59.569 31.163,61.406 39.891,70.134
NetC14_2: C14.2 C15.2 L2.1 U1.4 | length 17.5
  Top Layer w0.254: L2.1 28.256,64.744 C14.2 30.024,64.822 C15.2 30.803,64.833 U1.4
NetC20_2: C20.2 U1.2 Y1.1 | length 10.1
  Top Layer w0.2: Y1.1 34.075,72.091 35.215,73.231 37.786,73.231 U1.2
  Top Layer w0.254: C20.2 30.669,70.246 Y1.1
NetC21_2: C21.2 U1.3 Y1.2 | length 9.9
  Top Layer w0.2: Y1.2 34.07,70.51 34.721,69.84 35.103,69.84 U1.3
  Top Layer w0.254: C21.2 Y1.2@34.07,70.51
NetD1_1: D1.1 R6.1 | length 5.1
  Top Layer w0.2: D1.1 38.611,93.012 39.098,93.499 39.098,93.733
  Bottom Layer w0.2: R6.1 38.378,95.376 39.098,94.656 39.098,93.733
NetD1_2: D1.2 R7.1 | length 5.2
  Top Layer w0.254: v1(33.957,93.586) 34.53,93.012 D1.2
  Bottom Layer w0.254: v1(33.957,93.586) 33.957,94.962 34.371,95.376 R7.1
NetD1_3: D1.3 U1.29 | length 54.8
  Top Layer w0.2: D1.3 37.271,90.407 39.44,92.576 39.44,95.598 38.119,96.919 38.119,100.653 38.729,101.263 44.164,101.263 53.562,91.865 53.562,74.923 53.07,74.431 52.637,74.431 51.472,75.596 50.997,75.596 50.26,74.859 50.26,74.191 U1.29
NetD1_4: D1.4 U1.30 | length 65.7
  Top Layer w0.2: D1.4 35.871,90.862 33.395,93.338 33.395,97.529 34.004,98.138 34.004,101.275 34.423,101.694 45.256,101.694 54.858,92.093 54.858,71.113 54.477,70.732 52.038,70.732 51.657,71.113 51.657,73.289 51.097,73.849 U1.30
NetD10_1: D10.1 R22.2 | length 4.8
  Top Layer w0.254: D10.1 51.696,60.369 R22.2
NetJ1_3: J1.3 R10.2 | length 16.9
  Top Layer w0.2: R10.2 33.241,106.166 33.649,105.758 37.89,105.758 38.229,105.419 38.229,103.777 38.271,103.735 39.169,103.735 40.202,104.768 40.202,105.454 40.541,105.793 41.805,105.793 42.089,106.077 42.089,109.21 J1.3
NetJ1_4: J1.4 R9.2 | length 19.5
  Top Layer w0.2: R9.2 31.171,107.118 29.229,109.06 29.229,112.705 29.547,113.023 40.276,113.023 J1.4
NetJ1_5: J1.5 R11.2 | length 13.6
  Top Layer w0.2: v1(33.198,107.886) 34.466,106.617 R11.2
  Prepreg 2 w0.2: v1(33.198,107.886) 33.551,108.239 41.56,108.239 J1.5
NetJ1_6: J1.6 R8.2 | length 21.7
  Top Layer w0.2: R8.2 29.149,107.714 28.924,107.939 28.924,113.023 29.432,113.531 41.768,113.531 J1.6
NetJ2_3: J2.3 R12.2 | length 7.5
  Top Layer w0.2: J2.3 33.679,108.456 37.124,108.456 37.293,108.287 R12.2
NetJ2_4: J2.4 R15.2 | length 24.6
  Top Layer w0.2: J2.4 31.21,111.053 31.21,108.806 32.175,107.841 32.175,102.228 32.658,101.745 33.242,101.745 33.572,102.075 40.024,102.075 41.904,103.955 41.904,105.34 43.109,106.546 R15.2
NetJ2_5: J2.5 R13.2 | length 7.4
  Top Layer w0.2: J2.5 37.523,109.989 39.223,108.289 R13.2
NetJ2_6: J2.6 R14.2 | length 14.4
  Top Layer w0.2: J2.6 33.166,111.989 33.141,111.963 33.141,109.53 33.595,109.076 37.456,109.076 38.513,108.019 38.513,106.038 38.538,106.012 39.82,106.012 40.476,106.668 R14.2
NetJ3_2: J3.2 U4.1 | length 17.2
  Top Layer w0.2: v1(36.134,54.81) U4.1
  Bottom Layer w0.2: J3.2 37.656,50.298 40.951,50.298 41.408,50.754 41.408,54.353 40.951,54.81 v1(36.134,54.81)
NetJ3_3: J3.3 U4.3 | length 3.9
  Top Layer w0.2: J3.3 38.034,54.458 U4.3
NetQ1_1: Q1.1 R1.2 | length 2
  Top Layer w0.254: R1.2 Q1.1
NetQ1_2: Q1.2 R2.1 U1.19 | length 42.2
  Top Layer w0.2: Q1.2 40.786,97.627 40.786,92.906 41.396,92.296 43.732,92.296 53.257,82.771 53.257,76.193 52.96,75.896 47.385,75.896 46.73,75.24 46.73,70.651 U1.19
  Top Layer w0.254: R2.1 Q1.2@40.786,97.627
NetQ2_1: Q2.1 R2.2 | length 2.4
  Top Layer w0.254: Q2.1 R2.2
NetQ2_2: Q2.2 R1.1 U1.18 | length 50.3
  Top Layer w0.2: Q2.2 35.444,99.527 34.969,99.053 v1(34.969,98.596) 35.901,99.527 R1.1 ; v1(46.145,64.014) 46.145,66.506 47.619,67.979 47.619,68.843 46.855,69.607 U1.18
  Power w0.2: v1(34.969,98.596) 34.969,92.652 39.821,87.801 39.821,70.338 v1(46.145,64.014)
NetR16_2: R16.2 U1.14 | length 3.7
  Top Layer w0.2: U1.14 43.246,70.172 43.863,70.79 44.561,70.79 44.881,71.109
  Bottom Layer w0.2: 44.881,71.109 45.847,72.076 R16.2
NetR17_2: R17.2 U1.6 | length 3.8
  Top Layer w0.254: U1.6 41.378,73.994 41.883,73.994
  Bottom Layer w0.254: 41.883,73.994 41.969,74.079 42.935,74.079 R17.2
NetR18_1: R18.1 U1.63 U2.1 | length 11.5
  Top Layer w0.2: v1(29.36,78.165) 29.38,78.185 U2.1 38.456,78.185 38.938,77.703 U1.63
  Bottom Layer w0.2: R18.1 v1(29.36,78.165)
NetR19_1: R19.1 U1.62 U2.2 | length 12.5
  Top Layer w0.2: v1(29.315,79.901) 29.76,79.455 U2.2
  Top Layer w0.254: U2.2 37.926,79.455 U1.62
  Bottom Layer w0.2: R19.1 27.804,79.901 v1(29.315,79.901)
NetR20_1: R20.1 R21.2 U2.4 | length 4.5
  Top Layer w0.254: R20.1 30.866,83.933 U2.4 33.189,81.995 R21.2
NetR21_1: R21.1 U1.61 U2.3 | length 9.8
  Top Layer w0.254: U2.3 33.083,80.725 R21.1 37.531,80.557 U1.61
usb_N: U1.7 U4.6 | length 15.4
  Top Layer w0.2: U4.6 36.134,60.369 37.01,61.245 37.01,68.886 40.738,72.615 U1.7
usb_P: U1.8 U4.4 | length 14.9
  Top Layer w0.2: U4.4 38.034,60.629 37.464,61.2 37.464,68.698 41.059,72.294 U1.8
pads on no net: J3.SH2 J3.SH3 J3.SH4 S1.1 S1.4 S2.1 S2.4 U1.21 U1.22 U1.23 U1.24 U1.26 U1.27 U1.28 U1.32 U1.33 U1.34 U1.36 U1.43 U1.44 U1.45 U1.46 U1.48 U1.52 U1.53 U1.54 U1.55 U1.57 U1.58 U1.59 U1.60 U3.4 Y1.3 Y1.4

## Polygon pours and split planes (outlines as drawn)
3V3 on Power "3v3_plane" (solid, remove dead copper, pour order 1): 14.072,52.045 14.072,110.045 22.572,110.045 26.553,114.624 46.59,114.624 50.572,110.045 59.072,110.045 59.072,52.045 47.572,52.045 42.572,45.745 30.572,45.745 25.572,52.045
no net on Power "Power-No Net" (none, pour order 0): 32.665,46.589 33.465,46.589 33.465,48.489 32.665,48.489
GND on Top Layer "gnd_top_plane" (solid, remove dead copper, pour order 3): 14.072,52.045 14.072,110.045 22.572,110.045 26.553,114.624 46.59,114.624 50.572,110.045 59.072,110.045 59.072,52.045 47.572,52.045 42.572,45.745 30.572,45.745 25.572,52.045
GND on GND_plane "gnd_plane" (solid, remove dead copper, pour order 2): 14.072,52.045 14.072,110.045 22.572,110.045 26.553,114.624 46.59,114.624 50.572,110.045 59.072,110.045 59.072,52.045 47.572,52.045 42.572,45.745 30.572,45.745 25.572,52.045
GND on Bottom Layer "bottom_gnd_plane" (solid, remove dead copper, pour order 4): 30.572,45.745 25.572,52.045 14.072,52.045 14.072,110.045 22.572,110.045 26.553,114.624 46.59,114.624 50.572,110.045 59.072,110.045 59.072,52.045 47.572,52.045 42.572,45.745

## Keep-outs
Power:
  circle w0.013: c40.316,91.198 r1.295
  circle w0.013: c32.95,91.198 r1.295

## Silkscreen, mask and mechanical layers (free items; w line width, h text height)
Top Overlay:
  lines w0.254: 42.13,53.695 49.784,53.695 49.784,66.31 42.13,66.31 42.13,53.695
Mechanical 1:
  circle w0.013: c55.572,108.045 r1.2
  circle w0.013: c44.785,63.313 r0.483
  circle w0.013: c55.572,54.045 r1.2
  circle w0.013: c47.325,63.285 r0.483
  circle w0.013: c17.572,108.045 r1.2
  circle w0.013: c17.572,54.045 r1.2
  lines w0.013: 14.072,52.045 14.072,110.045 22.572,110.045 26.553,114.624 46.59,114.624 50.572,110.045 59.072,110.045 59.072,52.045 47.572,52.045 42.572,45.745 30.572,45.745 25.572,52.045 14.072,52.045